# Altium PCB ECEN5730_BRD1a.PcbDoc
Units mil, origin at the board's own origin, x right, y up, seen from the top; angles counter-clockwise.
Board outline 3500 x 2000 mil, 2 copper layers (Top Layer, Bottom Layer), stack 61.756 mil thick; 22 components, 12 nets, 57 pads, 13 vias.
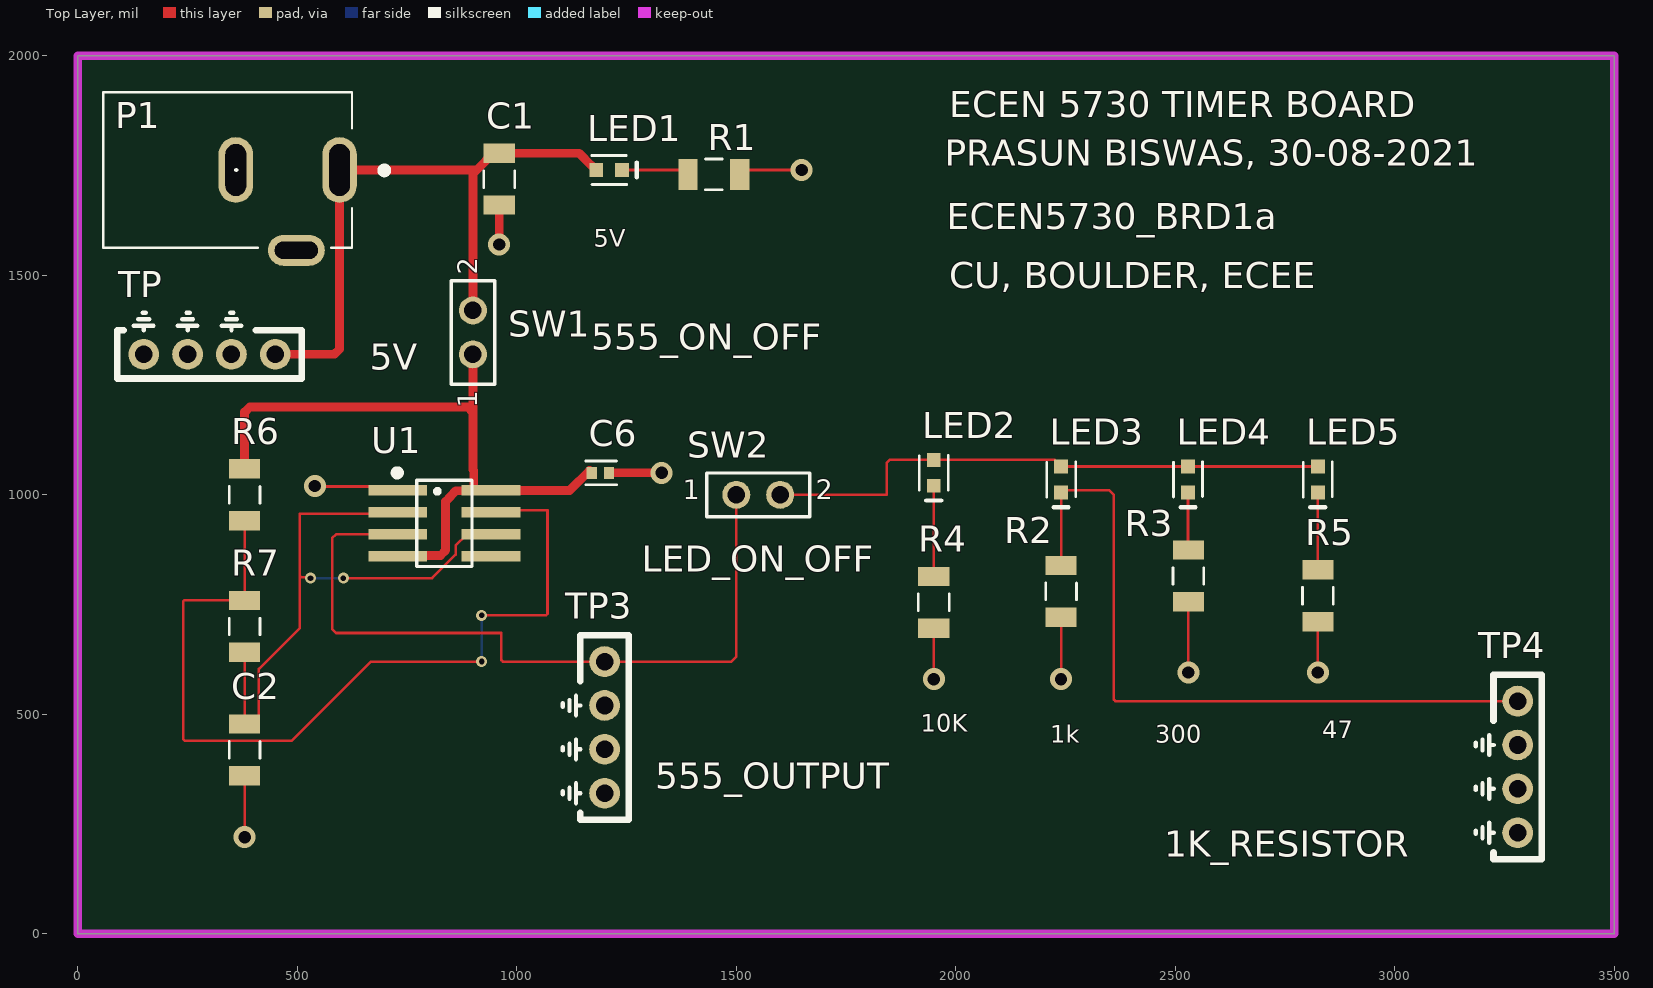
[diagram p0: Top Layer view]
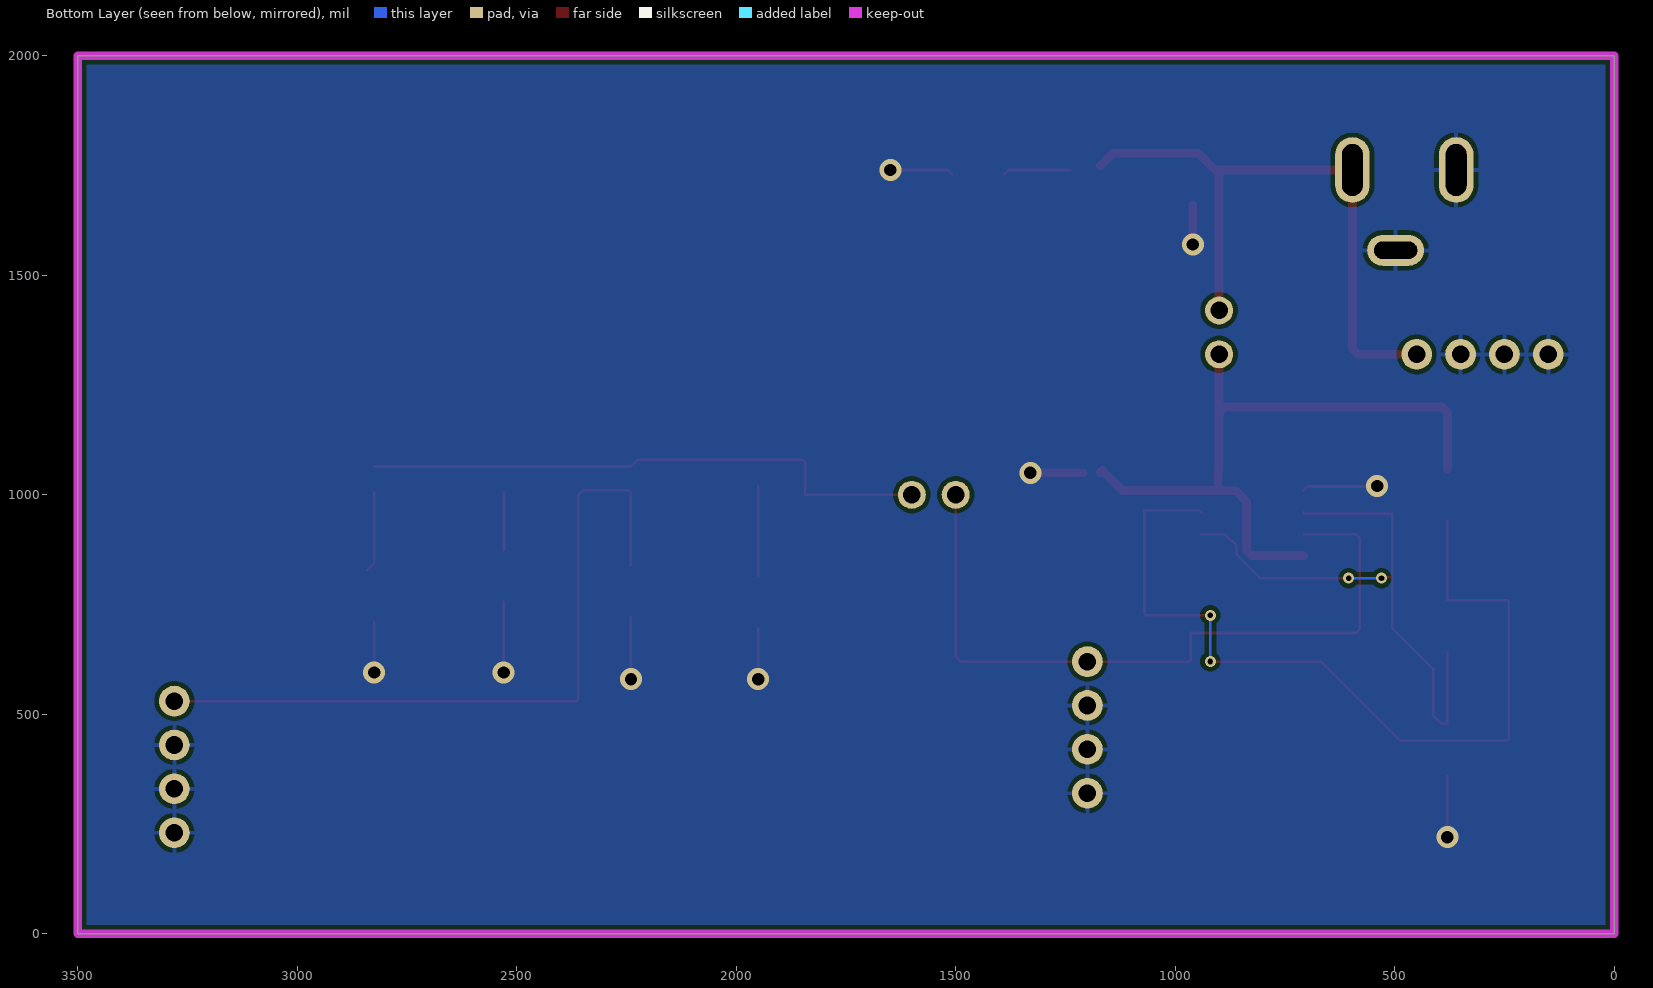
[diagram p1: Bottom Layer view, seen from below]
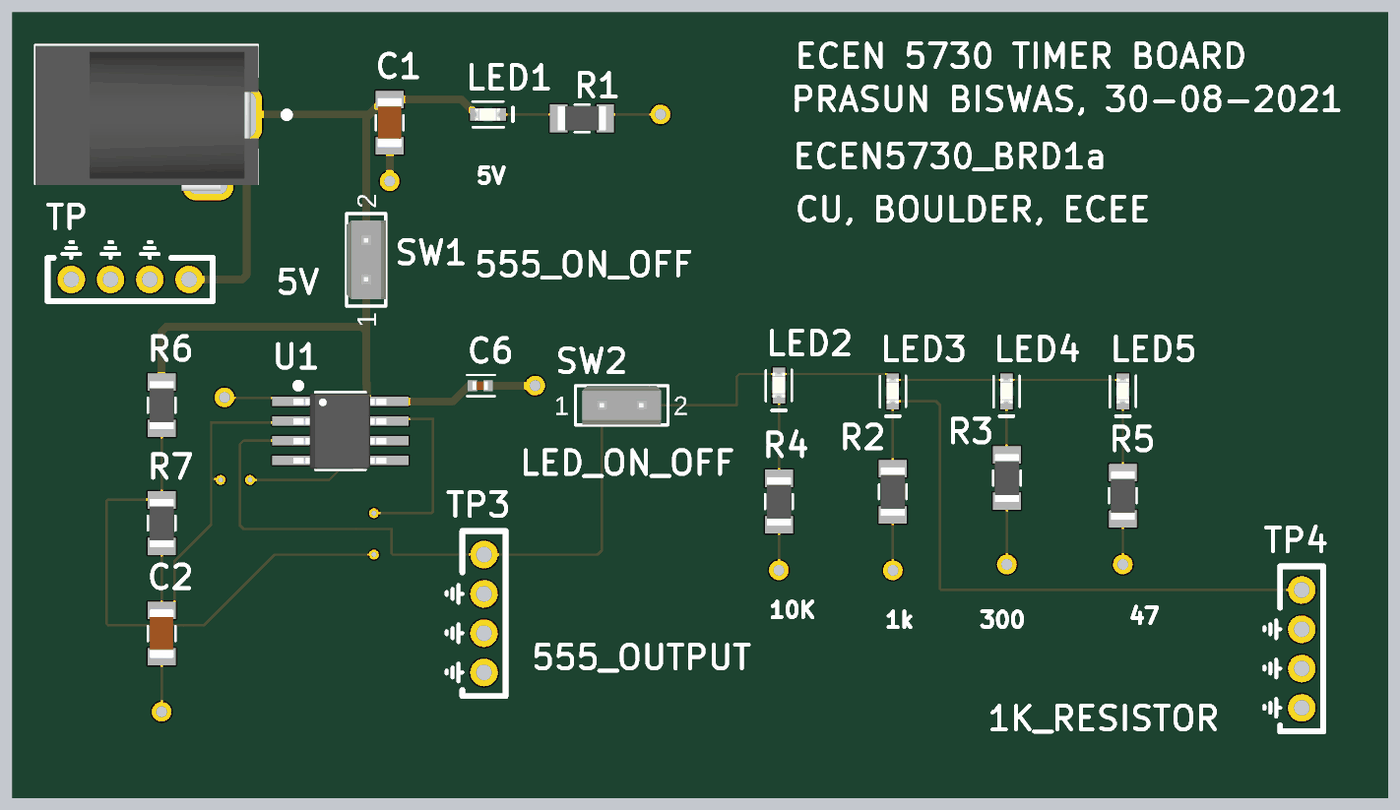
[diagram p2: 3D render of the assembled board from above, using the file's embedded part models]

## Layer stack, top to bottom
Top Solder: solder mask 1, SM-001, Dk 4
Top Layer: signal copper 1.378
Dielectric 1: core 59, Core-043, Dk 4.3
Bottom Layer: signal copper 1.378
Bottom Solder: solder mask 1, SM-001, Dk 4

## Board outline
0,0 3500,0 3500,2000 0,2000

## Design rules (kind name [scope] priority, off if disabled: settings)
BoardOutlineClearance [All] p1: gap=10 ignorepadtopadclearanceinfootprint=FALSE except(0: Arc-SplitContinuation Track-SplitContinuation SMDPad-SplitContinuation THPad-SplitContinuation Via-SplitContinuation Fill-SplitContinuation Poly-SplitContinuation Region-SplitContinuation Text-SplitContinuation)
Clearance [All] p1: gap=10 ignorepadtopadclearanceinfootprint=FALSE except(0: Arc-Hole Track-Hole SMDPad-Hole THPad-Hole Via-Hole Fill-Hole Poly-Hole Region-Hole Text-Hole)
PlaneClearance [All] p1: clearance=10
PlaneConnect [All] p1: planeconnectstyle=Direct reliefexpansion=20 reliefentries=4 reliefconductorwidth=10 reliefairgap=10
PolygonConnect [All] p1: thpad.connectstyle=Relief thpad.reliefconductorwidth=10 thpad.reliefentries=4 thpad.polygonreliefangle="90 Angle" thpad.airgapwidth=10 smdpad.connectstyle=Direct smdpad.reliefconductorwidth=10 smdpad.reliefentries=4 smdpad.polygonreliefangle="90 Angle" smdpad.airgapwidth=10 via.connectstyle=Direct via.reliefconductorwidth=10 via.reliefentries=4 via.polygonreliefangle="90 Angle" via.airgapwidth=10
RoutingVias [All] p1: holewidth=13 width=25 viastyle="Through Hole" minholewidth=13 minwidth=25 maxholewidth=60 maxwidth=80
SolderMaskExpansion [All] p1: expansion=4 istentingtop=FALSE
Width "Schematic Width Constraint_1" [InNet('5v')] p1: maxlimit=100 minlimit=10 preferedwidth=20 minimp=50.000000 maximp=50.000000 favimp=50.000000
Width "Schematic Width Constraint" [InNet('NetC6_1')] p2: maxlimit=100 minlimit=10 preferedwidth=20 minimp=50.000000 maximp=50.000000 favimp=50.000000
Width [All] p3: maxlimit=100 minlimit=6 preferedwidth=6 minimp=50.000000 maximp=50.000000 favimp=50.000000
28 further rules are at their usual default settings.

## Components (designator, comment, footprint, x,y, rotation, side; value= is the part's Value field where it differs from the comment)
C1 "1uF" 1206_Passive_Capacitor 960,1719 r90 top value=22uF
C2 "1uF" 1206_Passive_Capacitor 380,419 r90 top
C6 "22pF" 0402_Passive_Capacitor 1190.31,1050 r0 top value=22uF
LED1 "KT-0603R" LED_0603 1210.47,1740 r0 top value=Red
LED2 "KT-0603R" LED_0603 1950,1050 r270 top value=Red
LED3 "KT-0603R" LED_0603 2240,1035 r270 top value=Red
LED4 "KT-0603R" LED_0603 2529.22,1035 r270 top value=Red
LED5 "KT-0603R" LED_0603 2825,1035 r270 top value=Red
P1 "Power Jack" Power_Jack 596.22,1740 r180 top value="CONN PWR JACK 2X5.5MM SOLDER"
R1 "1k" 1206_Passive_Resitor 1449,1730 r180 top value="1K Ohm"
R2 "1k" 1206_Passive_Resitor 2240,780 r90 top value="1K Ohm"
R3 "300" 1206_Passive_Resitor 2530,815 r90 top value=300Ohm
R4 "10K" 1206_Passive_Resitor 1950,755 r90 top value=10KOhm
R5 "47 Ohms" 1206_Passive_Resitor 2825,770 r90 top value=47Ohm
R6 "1k" 1206_Passive_Resitor 380,1000 r90 top value="1K Ohm"
R7 "1k" 1206_Passive_Resitor 380,700 r90 top value="1K Ohm"
SW1 "on_off_switch" 2Pin-Header-Conn 900,1320 r90 top
SW2 "SW_2Pin_100mil_Switch" 2Pin-Header-Conn 1500,1000 r0 top
TP "TP_5V" TP10x_Probe 300,1320 r180 top
TP3 "TP_555_OUTPUT" TP10x_Probe 1200,470 r270 top
TP4 "10x Probe TP" TP10x_Probe 3280,380 r270 top
U1 "NE555DR" TS555IDTTR 835,935 r0 top (schematic designator U?)

## Footprints (in the part's own frame and the unit in brackets; to place one, negate y for a bottom-side part, rotate by r counter-clockwise, add the part's x,y. Pads: shape width x height; smd on the part's side, far side on the other; paste and mask are expansions set on the pad)
2Pin-Header-Conn [mm]
  round 1.62 hole 1.02: 1(0,0) 2(2.54,0)
  silkscreen extent -1.72,-1.27 4.26,1.26, body extent -1.27,-1.27 3.81,1.27, height 8.13
0402_Passive_Capacitor [mm] "Reference: https://www.worthingtonassembly.com/perfect-0402-footprint"
  rect 0.6x0.7 smd mask+0: 1(-0.5,0) 2(0.5,0)
  silkscreen extent -0.84,-0.69 0.94,0.69, body extent -0.5,-0.27 0.5,0.28, height 0.5
1206_Passive_Capacitor [mil]
  rect 44x71 smd: 1(-59,0) 2(59,0)
  silkscreen extent -19,-35 19,35, body extent -63,-31 63,32, height 50
1206_Passive_Resitor [mil]
  rect 44x71 smd: 1(-59,0) 2(59,0)
  silkscreen extent -19,-35 19,35, body extent -61,-31 61,31, height 26
LED_0603 [mm]
  rect 0.8x0.8 smd: 1(-0.75,0) 2(0.75,0)
  silkscreen extent -1.02,-0.84 1.6,0.84, body extent -0.84,-0.41 0.76,0.39, height 0.55
Power_Jack [mm]
  oval 2x3.8 hole 1.2 slot 3 at 90 deg: 1(0,0) 2(6,0)
  oval 3.3x1.8 hole 1 slot 2.5 at 0 deg: 3(2.5,4.65)
  silkscreen extent -2.79,-4.5 13.68,4.5, body extent -0.76,-4.45 13.64,4.95, height 11.49
TP10x_Probe [mil] "Small Probs footprint"
  round 70 hole 40: 1(-150,0) 2(-50,0) 2(50,0) 2(150,0)
  silkscreen extent -210,-95 210,55
TS555IDTTR [mm] "IC OSC Single Timer 2.7MHz 8SOIC"
  rect 3.4x0.6 smd: 1(-2.7,1.905) 2(-2.7,0.635) 3(-2.7,-0.635) 4(-2.7,-1.905) 5(2.7,-1.905) 6(2.7,-0.635) 7(2.7,0.635) 8(2.7,1.905)
  silkscreen extent -2.85,-2.5 1.6,3.05, body extent -3.03,-2.48 2.96,2.43, height 1.75

## Part data
C1 C2: library part C_1uF_1206, "MULTILAYER CERAMIC CAPACITORS MLCC - SMD/SMT 1UF 50V 1206 ROHS", LCSC Part#=C1848, MFR Part #=CL31B105KBHNNNE, Digikey Link=https://www.digikey.com/product-detail/en/C1206C105M4RACTU/399-8150-1-ND/3471873/?itemSeq=304982366, Digikey Part=399-8150-1-ND, Type=Basic
C6: library part C_22pF_0402, "MULTILAYER CERAMIC CAPACITORS MLCC - SMD/SMT 22PF 50V 0402 ROHS", LCSC Part#=C1555, MFR Part #=0402CG220J500NT, Datasheet=https://datasheet.lcsc.com/szlcsc/Guangdong-Fenghua-Advanced-Tech-0402CG220J500NT_C1555.pdf, Type=Basic
LED1 LED2 LED3 LED4 LED5: library part LED_RED_0603, "LIGHT EMITTING DIODES (LED) RED 520~625NM 90~100MCD@20MA TOP VIEW 0603 ROHS", LCSC Part#=C2286, Datasheet=https://datasheet.lcsc.com/szlcsc/Everlight-Elec-19-217-BHC-ZL1M2RY-3T_C72041.pdf, MFR Part #=KT-0603R, Type=Basic
P1: library part "P_Power Jack", "Power Barrel Connector Jack 2.10mm ID (0.083\"), 5.50mm OD (0.217\") Through Hole, Right Angle", LCSC Part#=C136744, Digikey Link=https://www.digikey.com/product-detail/en/PJ-102A/CP-102A-ND/275425/?itemSeq=304982367, Digikey Part=CP-102A-ND, Type=Extended
R1 R2 R6 R7: library part R_1K_1206, "CHIP RESISTOR - SURFACE MOUNT 1KOHMS ±1% 1/4W 1206 ROHS", LCSC Part#=C4410, MFR Part #=1206W4F1001T5, Digikey Link=https://www.digikey.com/product-detail/en/RNCP1206FTD1K00/RNCP1206FTD1K00CT-ND/2240675/?itemSeq=304982373, Digikey Part=RNCP1206FTD1K00CT-ND, Type=Basic
R3: library part R_300Ohm_1206, "CHIP RESISTOR - SURFACE MOUNT 300OHMS ±1% 1/4W 1206 ROHS", LCSC Part#=C17887, MFR Part #=1206W4F3000T5E, Datasheet=https://datasheet.lcsc.com/szlcsc/Uniroyal-Elec-1206W4F3000T5E_C17887.pdf, Type=Basic
R4: library part R_10KOhm_1206, "10 kOhms ±5% 0.25W, 1/4W Chip Resistor 1206 (3216 Metric) Automotive AEC-Q200 Thick Film", LCSC Part#=C17902, Digikey Link=https://www.digikey.com/product-detail/en/RMCF1206JT300R/RMCF1206JT300RCT-ND/1942776/?itemSeq=304982374, Digikey Part=RMCF1206JT300RCT-ND, Type=Basic
R5: library part R_47Ohm_1206, "47Ω ±5% 0.25W ±200ppm/℃ 1206 Chip Resistor - Surface Mount RoHS", LCSC Part#=C25384, MFR Part #=1206W4J0470T5E, Datasheet=https://datasheet.lcsc.com/lcsc/1811101020_UNI-ROYAL-Uniroyal-Elec-1206W4J0470T5E_C25384.pdf, Type=Extended
SW1: library part SW_2Pin_100mil_Switch, "2Pin Header", LCSC Part#=C124375, Type=Extended
SW2: "2Pin Header", LCSC Part#=C124375, Type=Extended
TP TP3 TP4: library part TP_10x_Probe, "Test Point 300 mil centers"
U1: library part U_555_Slow, "555 Timer SOIC-8_150MIL ROHS 150ns Rise Time", LCSC Part#=C7593, Digikey Link=https://www.digikey.com/product-detail/en/texas-instruments/NE555DR/296-6501-1-ND/372490, MFR Part #=NE555DR, Type=Basic

## Via types
v1: diameter 50, hole 28, Top Layer to Bottom Layer, 9 vias
v2: diameter 25, hole 13, Top Layer to Bottom Layer, 4 vias

## Nets (pads, with @x,y where several pads share a name; then routed paths per layer and width w, separated by ;. In a path a pad name is that pad's centre, name@x,y a point inside that pad or via, vN(x,y) a via of type N, cw(c..) or ccw(c..) an arc to the next point about the centre after c; other vN are vias at no path point)
5v: C1.2 LED1.1 P1.1 SW1.2 TP.1 | length 1484
  Top Layer w20: TP.1 584.5,1320 596.22,1331.72 P1.1 908.5,1740 ; SW1.2 900,1731.5 908.5,1740 ; LED1.1@1170,1750 1142,1778 C1.2 946.5,1778 908.5,1740
555_OUTPUT: SW2.1 TP3.1 U1.3 | length 1699.2
  Top Layer w6: U1.3@707.4,910 588.51,910 579.5,900.99 579.5,694.01 588.51,685 965,685 965,623.51 968.51,620 TP3.1 1488.78,620 1500,631.22 SW2.1
GND: C1.1 C2.1 C6.2 P1.2 P1.3 R1.1 R2.1 R3.1 R4.1 R5.1 TP3.2 TP4.2 TP.2 U1.1 | length 1200.7
  Top Layer w6: v1(380,220) C2.1 ; v1(540,1020) 541.19,1018.81 698.59,1018.81 U1.1@707.4,1010 ; R1.1 1518,1740 v1(1649,1740) ; v1(1950,580) R4.1 ; v1(2240,580) R2.1 ; v1(2530,595) R3.1 ; v1(2825,595) R5.1
  Top Layer w20: v1(960,1570) C1.1 ; C6.2 v1(1330,1050)
NetC2_2: C2.2 R7.1 U1.2 U1.6 | length 1395.5
  Top Layer w6: R7.1 C2.2 393.5,478 412.5,497 412.5,603.27 505.89,696.66 505.89,815 ; v2(530,810) 527.61,812.39 508.5,812.39 505.89,815 ; v2(605,810) 806.79,810 860.79,864 860.79,884.61 886.18,910 U1.6 ; U1.2@707.4,960 703.89,956.49 505.89,956.49 505.89,815
  Bottom Layer w6: v2(530,810) v2(605,810)
NetC6_1: C6.1 R6.2 SW1.1 U1.4 U1.8 | length 1583.4
  Top Layer w20: R6.2 380,1188.28 391.72,1200 888.41,1200 900,1188.41 ; U1.4@707.4,860 709.21,861.81 826.08,861.81 837.79,873.53 837.79,984.82 849.37,996.39 849.37,997.33 861.09,1009.05 902.67,1009.05 U1.8@903.62,1010 ; SW1.1 900,1188.41 ; C6.1 1170.63,1051.97 1168.82,1053.78 1166.85,1053.78 1165.63,1055 1120.63,1010 920,1010 U1.8@903.62,1010 ; 900,1188.41 900,1056.81 901.81,1055 901.81,1011.81 U1.8@903.62,1010
NetLED1_2: LED1.2 R1.2 | length 154.1
  Top Layer w6: LED1.2 1380,1740 R1.2
NetLED2_1: LED2.1 LED3.1 LED4.1 LED5.1 SW2.2 | length 1306.9
  Top Layer w6: SW2.2 1843,1000 1843,1073 1849.53,1079.53 LED2.1 2225,1079.53 LED3.1 LED4.1 LED5.1
NetLED2_2: LED2.2 R4.2 | length 206.5
  Top Layer w6: R4.2 LED2.2
NetLED3_2: LED3.2 R2.2 TP4.1 | length 1680.4
  Top Layer w6: R2.2 LED3.2 2244.53,1010 2350,1010 2360,1000 2360,533.51 2363.51,530 TP4.1
NetLED4_2: LED4.2 R3.2 | length 131.8
  Top Layer w6: LED4.2 2529.22,874.78 R3.2
NetLED5_2: LED5.2 R5.2 | length 182.7
  Top Layer w6: LED5.2 2825,844 R5.2@2840,829
NetR6_1: R6.1 R7.2 U1.7 | length 2016.6
  Top Layer w6: R6.1 R7.2 379,760 243.51,760 240,756.49 240,443.51 243.51,440 487.43,440 667.43,620 v2(920,620) ; v2(920,725.5) 1066.49,725.5 1070,729.01 1070,965 946.3,965 U1.7
  Bottom Layer w6: v2(920,620) v2(920,725.5)
pads on no net: U1.5

## Polygon pours and split planes (outlines as drawn)
GND on Bottom Layer "GND_L02_P001" (solid, pour order 1): 0,2000 3500,2000 3500,0 0,0

## Keep-outs
Keep-Out Layer:
  the board outline again, w20

## Silkscreen, mask and mechanical layers (free items; w line width, h text height)
Top Overlay:
  text "ECEN 5730 TIMER BOARD" at 1985,1860 h60
  text "PRASUN BISWAS, 30-08-2021" at 1975,1749.99 h60
  text "ECEN5730_BRD1a" at 1980,1605 h60
  text "5V" at 1175,1565 h40
  text "CU, BOULDER, ECEE" at 1985,1469.99 h60
  text "555_ON_OFF" at 1170,1330 h60
  text "5V" at 665,1285 h60
  text "LED_ON_OFF" at 1285,825 h60
  text "10K" at 1920,460 h40
  text "47" at 2835,445 h40
  text "1k" at 2215,435 h40
  text "300" at 2455,435 h40
  text "555_OUTPUT" at 1315,330 h60
  text "1K_RESISTOR" at 2475,175 h60
Mechanical 1:
  the board outline again, w20

## Text inside footprints (layer, text, board x,y; h text height)
SW1: Top Overlay "2" at 925,1501.14 h77.5 r90; Top Overlay "1" at 925,1198.35 h77.5 r90; Mechanical 16 "2" at 925,1501.14 h77.5 r90; Mechanical 16 "1" at 925,1198.35 h77.5 r90
SW2: Top Overlay "1" at 1378.35,975 h77.5; Top Overlay "2" at 1681.14,975 h77.5; Mechanical 16 "1" at 1378.35,975 h77.5; Mechanical 16 "2" at 1681.14,975 h77.5